# EAGLE board simple_record (EAGLE 6.6.0)
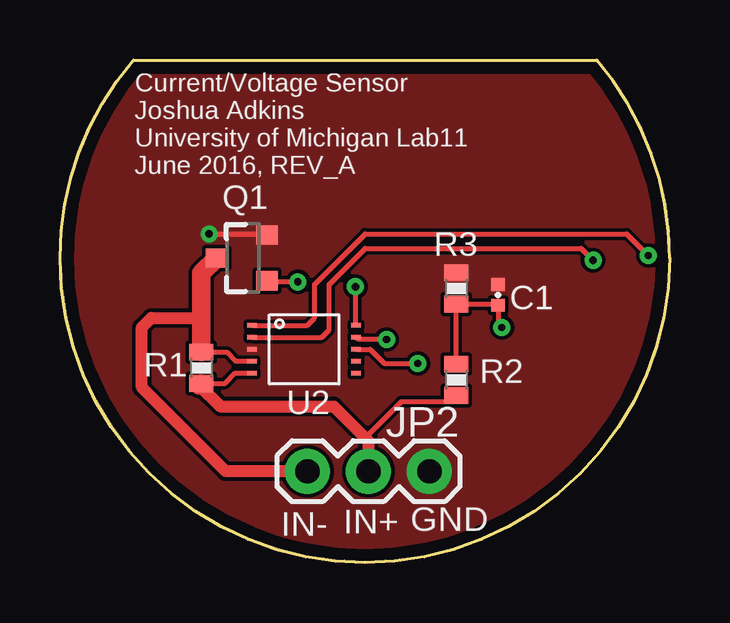
[diagram p0: board, top side]
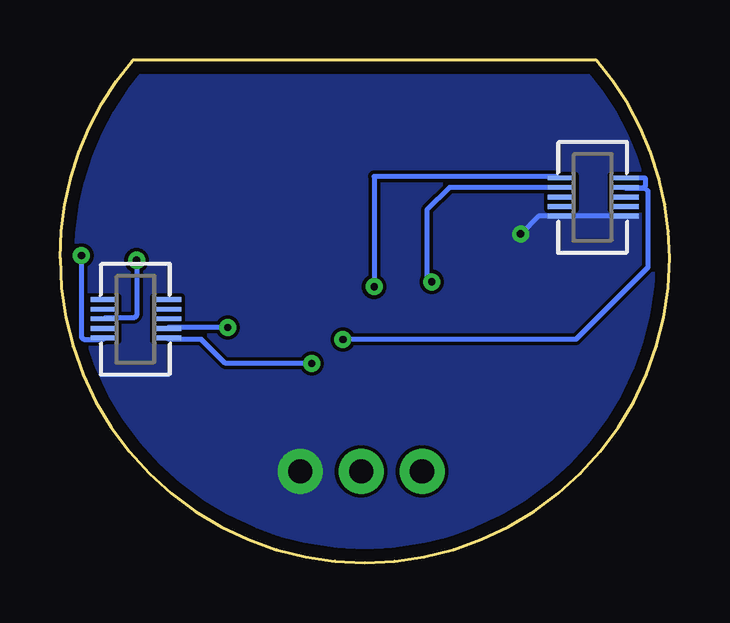
[diagram p1: board, bottom side, seen from below]

Size 25.4 x 20.96 mm. Coordinates in mm from the lower left corner, seen from the top.
Outline: 25.4,12.7 arc-180 0,12.7 arc-41 3.06,20.96 22.36,20.96 arc-41 25.4,12.7
Copper layers (1*16): Top 0.0178mm / dielectric 59mil / Bottom 0.0178mm
Design rules "sunstone-2lyr_v1.0.0.3": minimum track width 6mil, minimum drill 14mil, track to track 6mil, track to pad 6mil, pad to pad 6mil, via to via 6mil, smd to smd 6mil, copper to edge 20mil, drill to drill 16mil, minimum pad ring 8mil, minimum via ring 8mil, stop-mask expansion 3mil, vias tented up to drill 50mil, thermal gap 10mil

## Footprints (pad centres in the part's own frame; a part is rotated, then mirrored left to right if it is on the bottom)
0402_CAP = smd 0.536 x 0.546: 1 -0.433,0; 2 0.433,0
SQUALL_HEADER = smd 1.14 x 0.2 bottom: A1 -10.845,3.34; A2 -8.205,3.34; A3 -10.845,2.94; A4 -8.205,2.94; A5 -10.845,2.54; A6 -8.205,2.54; A7 -10.845,2.14; A8 -8.205,2.14; A9 -10.845,1.74; A10 -8.205,1.74; B1 8.205,-1.74; B2 10.845,-1.74; B3 8.205,-2.14; B4 10.845,-2.14; B5 8.205,-2.54; B6 10.845,-2.54; B7 8.205,-2.94; B8 10.845,-2.94; B9 8.205,-3.34; B10 10.845,-3.34
1X03 = drill 1.016 pad 1.88: 1 0,0; 2 2.54,0; 3 5.08,0
SOT23-3 = smd 0.8 x 0.9: 1 -0.95,-1; 2 0.95,-1; 3 0,1.1
0603-RES = smd 0.7 x 1: 1 -0.65,0; 2 0.65,0
UMAX10 = smd 0.2 x 0.4: 1 -1,-2.17; 2 -0.5,-2.17; 3 0,-2.17; 4 0.5,-2.17; 5 1,-2.17; 6 1,2.17; 7 0.5,2.17; 8 0,2.17; 9 -0.5,2.17; 10 -1,2.17

## Placement (x,y rotation side)
C1  10uF  [0402_CAP]  18.25,11.17 90 top
J1  SQUALL_HEADER  [SQUALL_HEADER]  12.71,12.71 0 top
JP2  [1X03]  10.31,3.81 0 top
Q1  MOSFET-NCHANNELSMD  [SOT23-3]  7.63,12.71 90 top
R1  0.12  [0603-RES]  5.89,8.13 270 top
R2  100K  [0603-RES]  16.52,7.63 270 top
R3  100K  [0603-RES]  16.52,11.44 270 top
U2  MAX9939  [UMAX10]  10.17,8.9 270 top

## Library data of the parts
C1 R1-R3 = passives
J1 = squall; DIGIKEY: H11617CT-ND
JP2 = SparkFun-Connectors
Q1 = fets
U2 = chips; DIGIKEY: MAX9939AUB+-ND

## Nets
CURRENT_SWITCH: J1.A4 Q1.1
GND: C1.2 J1.A9 J1.A10 JP2.3 Q1.2 R3.1 U2.3
INA-: JP2.1 Q1.3 R1.1 U2.4
MISO: J1.B8
MOSI: J1.B6 U2.2
PGA_CS: J1.A2 U2.10
PGA_OUT: J1.B9 U2.8
PV+: JP2.2 R1.2 R2.2 U2.5
SCLK: J1.B10 U2.1
VCC: J1.A1 J1.A3 U2.9
VOUT: C1.1 J1.B7 R2.1 R3.2

## Tracks (layer width: path | path; a pad name or v marks a point on that pad's centre or on a via)
CURRENT_SWITCH  (via drill 0.3)
  Top 0.203: v9.91,11.71 8.68,11.71 Q1.1
  Bottom 0.203: J1.A4 9.17,15.65 10.11,14.71 10.11,11.91 v9.91,11.71
GND  (via drill 0.3)
  Top 0.203: v6.21,13.71 8.58,13.71 Q1.2
  Bottom 0.203: J1.A9 J1.A10 5.47,14.45 v6.21,13.71
  pour Top (no thermals): 0.01,21.21 -0.09,-0.19 25.31,0.01 25.61,21.01
  pour Bottom (no thermals): 0.01,21.21 -0.09,-0.19 25.31,0.01 25.61,21.01
INA-
  Top 0.203: R1.1 6.94,8.78 7.31,8.41 U2.4
  Top 0.508: JP2.1 6.91,3.81 3.41,7.31 3.41,9.81 3.81,10.21 5.69,10.21 5.89,10.01
  Top 0.762: R1.1 5.89,10.01 5.89,12.07 Q1.3
MOSI  (via drill 0.3)
  Top 0.203: U2.2 10.9,9.4 11.21,9.71 11.21,11.61 12.71,13.11 21.71,13.11 v22.21,12.61
  Bottom 0.203: v22.21,12.61 22.21,10.31 22.31,10.21 23.52,10.21 J1.B6
PGA_CS  (via drill 0.3)
  Top 0.203: v12.31,11.51 12.31,9.93 U2.10
  Bottom 0.203: J1.A2 arc60 4.71,16.11 12.31,16.11 v12.31,11.51
PGA_OUT  (via drill 0.3)
  Top 0.203: U2.8 12.92,8.9 13.51,8.31 v14.91,8.31
  Bottom 0.203: v14.91,8.31 18.51,8.31 19.51,9.31 20.86,9.31 J1.B9
PV+
  Top 0.203: R1.2 6.88,7.48 7.31,7.91 U2.5 | R2.2 16.25,6.71 14.21,6.71 12.71,5.21
  Top 0.508: 5.81,7.4 6.7,6.51 11.41,6.51 12.71,5.21 12.85,5.07 JP2.2
  Top 0.762: 5.81,7.4 R1.2
SCLK  (via drill 0.3)
  Top 0.203: U2.1 10.3,9.9 10.61,10.21 10.61,11.61 12.71,13.71 23.61,13.71 v24.51,12.81
  Bottom 0.203: v24.51,12.81 24.51,9.41 24.41,9.31 23.62,9.31 J1.B10
VCC  (via drill 0.3)
  Top 0.203: v13.61,9.31 12.43,9.31 U2.9
  Bottom 0.203: J1.A1 1.05,16.05 1.01,16.01 1.01,15.71 1.11,15.61 1.82,15.61 J1.A3 1.05,15.65 0.91,15.51 0.91,12.31 3.91,9.31 v13.61,9.31
VOUT  (via drill 0.3)
  Top 0.203: R2.1 R3.2 18.2,10.79 C1.1 18.25,9.97 v18.41,9.81
  Bottom 0.203: v18.41,9.81 20.88,9.81 J1.B7

## Text on the board
tPlace: IN- | IN+ | GND
tNames: Current/Voltage Sensor / Joshua Adkins / University of Michigan Lab11 / June 2016, REV_A